# Altium PCB MAGIsDebugger-bak.PcbDoc
Units mil, origin at the board's own origin, x right, y up, seen from the top; angles counter-clockwise.
Board outline 6000 x 4000 mil, 2 copper layers (Top Layer, Bottom Layer); 28 components, 27 nets, 161 pads, 20 vias.
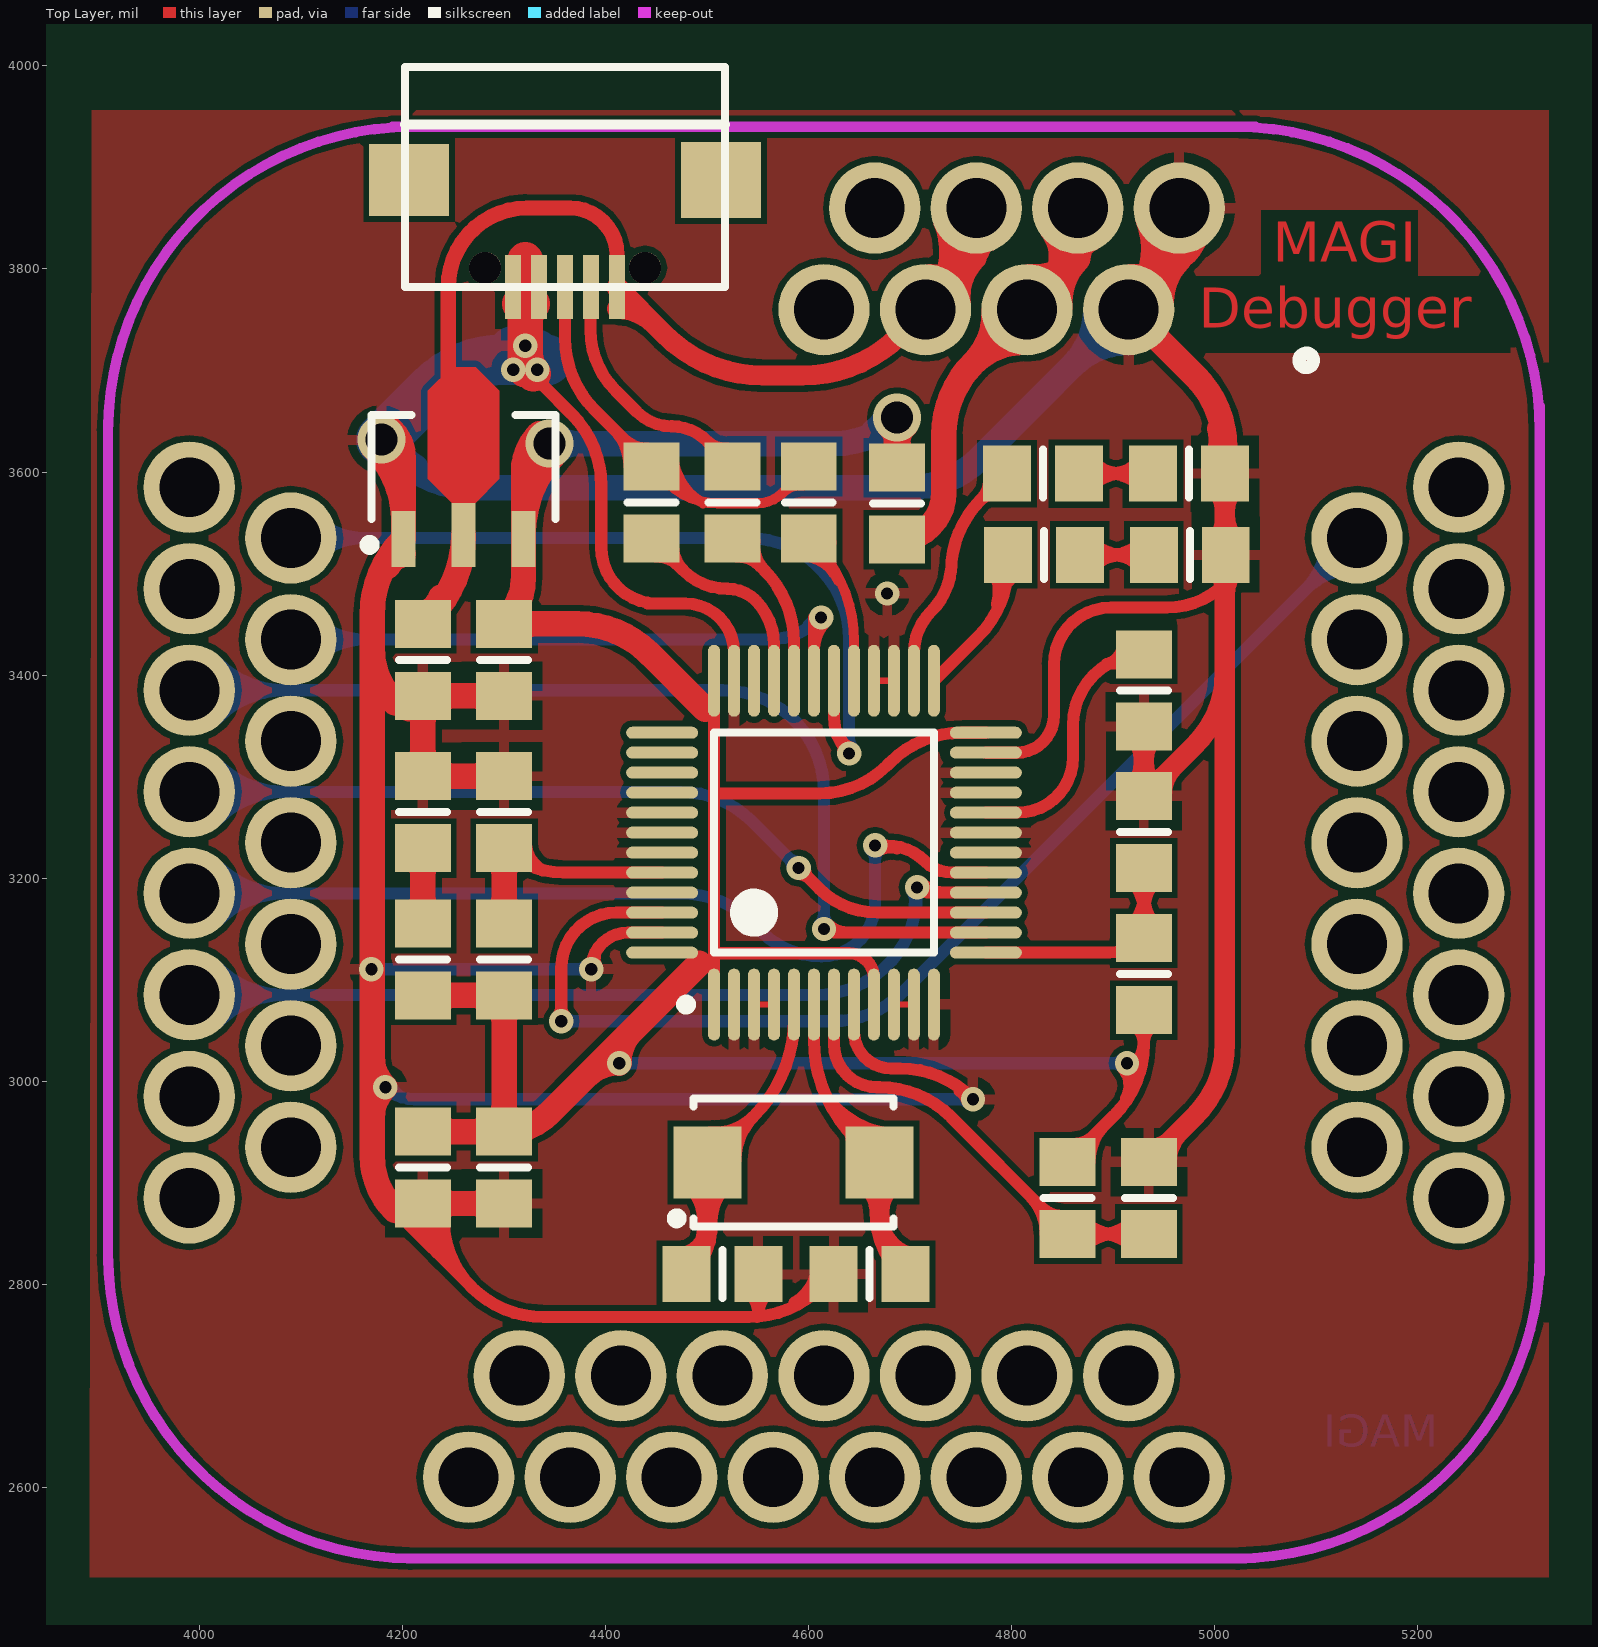
[diagram p0: Top Layer view]
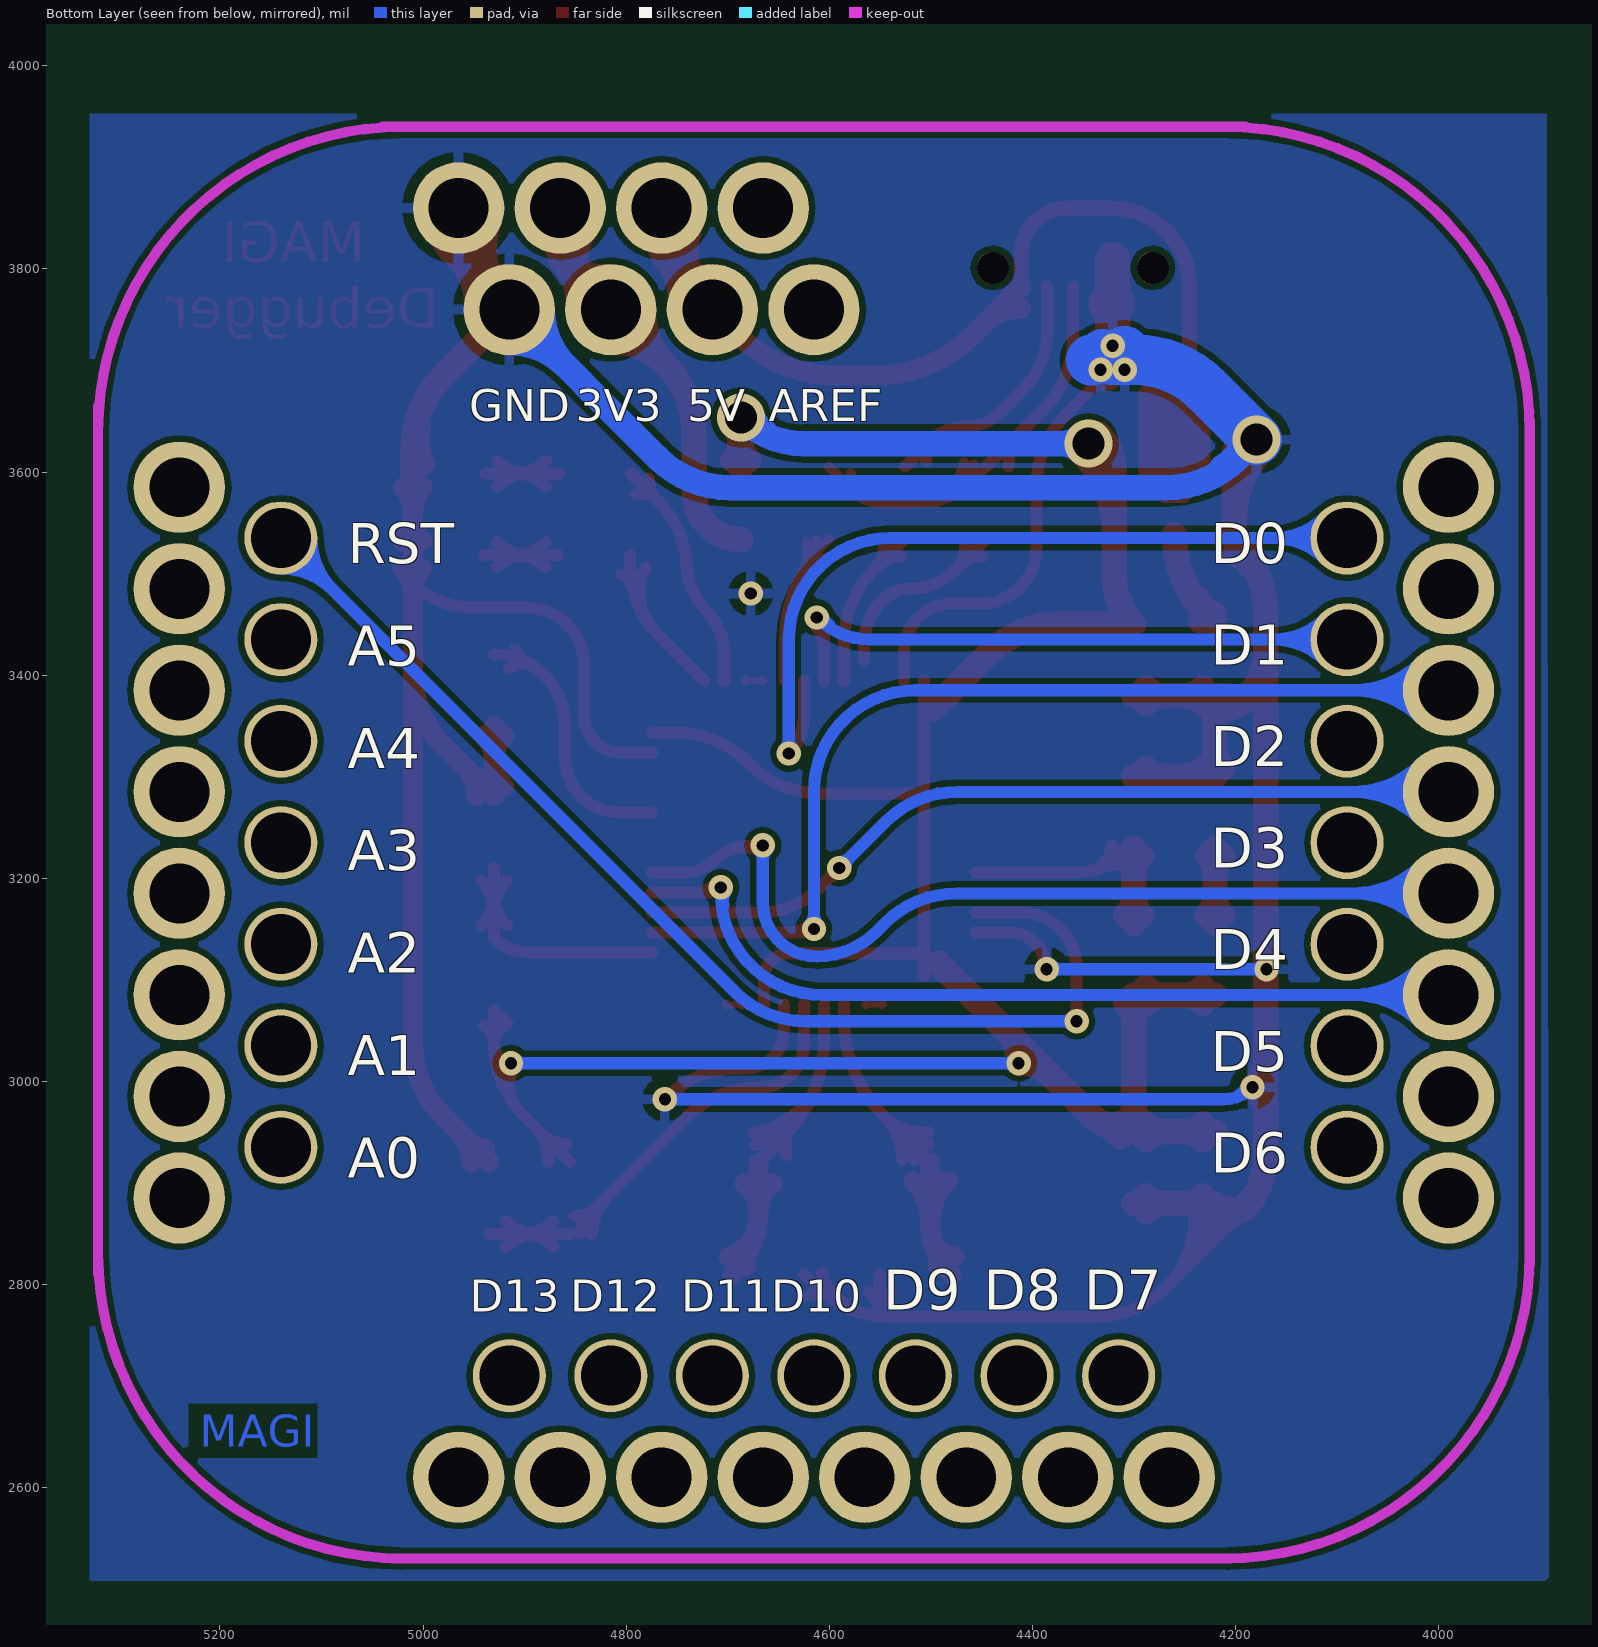
[diagram p1: Bottom Layer view, seen from below]

## Layer stack, top to bottom
Top Solder: solder mask 0.4, Solder Resist, Dk 3.5
Top Layer: signal copper 1.4
Dielectric 1: dielectric 12.6, FR-4, Dk 4.8
Bottom Layer: signal copper 1.4
Bottom Solder: solder mask 0.4, Solder Resist, Dk 3.5

## Board outline
1000,1000 7000,1000 7000,5000 1000,5000

## Design rules (kind name [scope] priority, off if disabled: settings)
Clearance [All] p1: gap=6
PolygonConnect [All] p1: connectstyle=Relief reliefconductorwidth=10 reliefentries=4 polygonreliefangle="90 Angle" airgapwidth=10
RoutingVias [All] p1: holewidth=28 width=50 viastyle="Through Hole" minholewidth=12 minwidth=24 maxholewidth=280 maxwidth=500
SolderMaskExpansion [All] p1: expansion=4
Width [All] p1: maxlimit=100 minlimit=6 preferedwidth=10
29 further rules are at their usual default settings.

## Components (designator, comment, footprint, x,y, rotation, side; value= is the part's Value field where it differs from the comment)
C1 "10uf" 6-0805_n 4220,3415 r270 top
C2 "10uf" 6-0805_n 4300,3415 r270 top
C3 "10uf" 6-0805_n 4300,2915 r270 top
C4 "10uf" 6-0805_N 4220,2915 r270 top
C5 "15PF" 6-0805_n 4515,2810 r180 top
C6 "15PF" 6-0805_n 4660,2810 r0 top
C7 "104" 6-0805_n 4935,2885 r270 top
J1 "MAGIsBoard-2x" MAGIsBoard-2x 4615,3235 r0 top
LED1 "LED_3" 6-0805_n 4975.28,3518.42 r0 top
LED2 "LED_3" 6-0805_n 4974.41,3598.43 r0 top
LED3 "LED_3" 6-0805_n 4220,3265 r90 top
R1 "10K" 6-0805_n 4600,3570 r270 top
R2 "10K" 6-0805_n 4525,3570 r270 top
R3 "10K" 6-0805_n 4930,3105.43 r270 top
R4 "10K" 6-0805_n 4445,3570 r270 top
R5 "10K" 6-0805_n 4930,3245.43 r270 top
R6 "10K" 6-0805_n 4855,2885 r90 top
R7 "10K" 6-0805_n 4300,3120 r270 top
R8 "10K" 6-0805_n 4300,3265 r270 top
R9 "10K" 6-0805_n 4930,3385 r90 top
R10 "RES1_1" 6-0805_n 4831.57,3518.42 r180 top
R11 "RES1_1" 6-0805_n 4830.71,3598.43 r180 top
R12 "RES1_1" 6-0805_n 4220,3120 r270 top
R13 "0" 6-0805_n 4687.01,3568.9 r270 top
U1 "USB" microUSB 4360,3805 r0 top
U2 "STM32F103CBT6" LQFP48_N 4615,3235 r90 top
U3 "HS7333" HS7333 4260,3605 r90 top
X1 "8M" 5032 4595,2920 r270 top

## Footprints (in the part's own frame and the unit in brackets; to place one, negate y for a bottom-side part, rotate by r counter-clockwise, add the part's x,y. Pads: shape width x height; smd on the part's side, far side on the other; paste and mask are expansions set on the pad)
6-0805_n [mm] "Chip Resistor, Body 2.0x1.2mm, IPC Medium Density"
  rect 1.2x1.4 smd: 1(-0.9,0) 2(0.9,0)
  silkscreen extent 0,-0.6 0,0.6, body extent -1.07,-0.7 1.07,0.7, height 0.7
6-0805_N [mm] "Chip Resistor, Body 2.0x1.2mm, IPC Medium Density"
  rect 1.2x1.4 smd: 1(-0.9,0) 2(0.9,0)
  silkscreen extent 0,-0.6 0,0.6, body extent -1.07,-0.7 1.07,0.7, height 0.7
5032 [mm]
  rect 1.8x1.7 smd: 1(0,-2.404) 2(0,1.896)
  silkscreen extent -1.6,-3.3 1.6,2.25
HS7333 [mm] "SOT89, 3-Leads, Body 4.50x2.50mm, Pitch 1.50mm, Lead Span 4.1mm, IPC Medium Density"
  rect 1.4x0.6 smd: 1(-1.8,1.5) 3(-1.8,-1.5)
  rect 1.6x0.6 smd: 2(-1.7,0)
  Top Layer region: -0.9,0.3 -0.3,0.9 1.9,0.9 2.5,0.3 2.5,-0.3 1.9,-0.9 -0.3,-0.9 -0.9,-0.3
  silkscreen extent -2.07,-2.3 1.3,2.47, body extent -1.3,-2.3 1.3,2.3, height 1.6
LQFP48_N [mm] "Thin QFP, 48-Leads, Body 7x7mm, Pitch 0.5mm, IPC Medium Density"
  oval 1.8x0.3 smd: 1(-4.05,2.75) 2(-4.05,2.25) 3(-4.05,1.75) 4(-4.05,1.25) 5(-4.05,0.75) 6(-4.05,0.25) 7(-4.05,-0.25) 8(-4.05,-0.75) 9(-4.05,-1.25) 10(-4.05,-1.75) 11(-4.05,-2.25) 12(-4.05,-2.75) 25(4.05,-2.75) 26(4.05,-2.25) 27(4.05,-1.75) 28(4.05,-1.25) 29(4.05,-0.75) 30(4.05,-0.25) 31(4.05,0.25) 32(4.05,0.75) 33(4.05,1.25) 34(4.05,1.75) 35(4.05,2.25) 36(4.05,2.75)
  oval 0.3x1.8 smd: 13(-2.75,-4.05) 14(-2.25,-4.05) 15(-1.75,-4.05) 16(-1.25,-4.05) 17(-0.75,-4.05) 18(-0.25,-4.05) 19(0.25,-4.05) 20(0.75,-4.05) 21(1.25,-4.05) 22(1.75,-4.05) 23(2.25,-4.05) 24(2.75,-4.05) 37(2.75,4.05) 38(2.25,4.05) 39(1.75,4.05) 40(1.25,4.05) 41(0.75,4.05) 42(0.25,4.05) 43(-0.25,4.05) 44(-0.75,4.05) 45(-1.25,4.05) 46(-1.75,4.05) 47(-2.25,4.05) 48(-2.75,4.05)
  silkscreen extent -4.17,-2.75 2.75,3.57, body extent -3.5,-3.5 3.5,3.5, height 1.6
MAGIsBoard-2x [mil]
  round 90 hole 59.06: 1(300,525) 1(350,625) 2(200,525) 2(250,625) 3(100,525) 3(150,625) 4(0,525) 4(50,625) 29(-625,350) 30(-625,250) 31(-625,150) 32(-625,50) 33(-625,-50) 34(-625,-150) 35(-625,-250) 36(-625,-350) 37(-350,-625) 38(-250,-625) 39(-150,-625) 40(-50,-625) 41(50,-625) 42(150,-625) 43(250,-625) 44(350,-625) 45(625,-350) 46(625,-250) 47(625,-150) 48(625,-50) 49(625,50) 50(625,150) 51(625,250) 52(625,350)
  round 90 / inner round 90 / far side round 72 hole 59.06: 8(-525,300) 9(-525,200) 10(-525,100) 11(-525,0) 12(-525,-100) 13(-525,-200) 14(-525,-300) 15(-300,-525) 16(-200,-525) 17(-100,-525) 18(0,-525) 19(100,-525) 20(200,-525) 21(300,-525) 22(525,-300) 23(525,-200) 24(525,-100) 25(525,0) 26(525,100) 27(525,200) 28(525,300)
  Keep-Out Layer lines w10: -705,-415 -705,415 ; -705,-405 ccw(c-405,-405) -405,-705 ; -705,405 cw(c-405,405) -405,705 ; -425,705 425,705 ; -410,-705 415,-705 ; 405,-705 ccw(c405,-405) 705,-405 ; 405,705 cw(c405,405) 705,405 ; 705,-425 705,430
  silkscreen extent 468,468 482,482
microUSB [mm]
  round 0.8 hole 0.8: 0(-2,-0.1) 0(2,-0.1)
  rect 0.4x1.6 smd: 1(1.3,-0.576) 2(0.65,-0.576) 3(0,-0.576) 4(-0.65,-0.576) 5(-1.3,-0.576)
  rect 2x1.8 smd: 6(-3.9,2.1)
  rect 2x1.9 smd: 7(3.9,2.1)
  silkscreen extent -4,-0.58 4,4.92, body extent -4.1,-0.68 4.1,5.02, height 3

## Part data
C1 C2 C3 C4: library part "CAPACITOR POL", "Capacitor"
C5 C6 C7: library part CAP
R1 R2 R3 R4 R5 R6 R7 R8 R9 R13: library part RES
U2: "STM32 ARM-based 32-bit MCU with 128 Kbytes Flash, 48-pin LQFP, Industrial Temperature"
X1: library part CRYSTAL

## Via types
v1: diameter 24, hole 12, Top Layer to Bottom Layer, 17 vias
v2: diameter 47.24, hole 31.5, Top Layer to Bottom Layer, 3 vias

## Nets (pads, with @x,y where several pads share a name; then routed paths per layer and width w, separated by ;. In a path a pad name is that pad's centre, name@x,y a point inside that pad or via, vN(x,y) a via of type N, cw(c..) or ccw(c..) an arc to the next point about the centre after c; other vN are vias at no path point)
3.3V: C2.1 C3.1 C4.1 R3.2 R6.2 R7.2 R12.2 R13.1 U2.1 U2.9 U2.24 U2.36 U2.48 U3.3 | length 3877.1
  Top Layer w12: U2.1@4506.73,3104.33 4506.73,3126.73 ; U2.36 4506.73,3283.46 ; U2.9 4664.21,3101.54 ccw(c4639.76,3101.54) 4639.76,3125.98 4507.48,3125.98 cw(c4507.48,3126.73) 4506.73,3126.73 ; U2.24 4750.83,3343.27 ccw(c4750.83,3243.27) 4680.12,3313.98 4677.17,3311.02 cw(c4610.63,3377.56) 4610.63,3283.46 4506.73,3283.46 ; R6.2 4900.71,2966.14 ccw(c4830,3036.85) 4930,3036.85 ; R6.2@4858.94,2938.06 ccw(c4858.94,2971.09) 4882.3,2947.73 ; R6.2@4876.56,2920.43 cw(c4928.61,2920.43) 4891.8,2957.24 ; v1@4908.97,3013.65 cw(c4889.54,2995.77) 4912.78,2983.23 ; v1@4915.35,3012.05 ccw(c4908.77,3031) 4928.6,3027.9 ; R3.2@4916.85,3056.85 R3.2 4930,3036.85 ; v1@4916.92,3012.87 ccw(c4898.4,3038.27) 4929.46,3033.41 ; v1@4917.8,3021.78 cw(c4902.64,3007.83) 4920.77,2998.05 ; R3.2@4920.15,3055.39 cw(c4907.64,3036.86) 4930,3036.86 ; R3.2@4939.85,3055.39 ccw(c4952.36,3036.86) 4930,3036.86 ; 4506.73,3126.73 4506.73,3283.46
  Top Layer w25: C4.1 C3.1 ; R12.2 R7.2 C3.1 ; C4.1@4231.8,2942.57 cw(c4250.79,2923.58) 4250.79,2950.43 cw(c4250.79,2977.28) C4.1@4231.8,2958.3 ; R12.2@4231.8,3076.7 cw(c4250.79,3057.72) 4250.79,3084.57 cw(c4250.79,3111.42) R12.2@4231.8,3092.43 ; C3.1@4288.2,2942.57 ccw(c4269.21,2923.58) 4269.21,2950.43 ccw(c4269.21,2977.28) C3.1@4288.2,2958.3 ; R7.2@4288.2,3076.7 ccw(c4269.21,3057.72) 4269.21,3084.57 ccw(c4269.21,3111.42) R7.2@4288.2,3092.43 ; C3.1@4292.14,2958.3 ccw(c4273.15,2977.28) 4300,2977.28 ccw(c4326.85,2977.28) C3.1@4307.86,2958.3 ; R7.2@4292.14,3076.7 cw(c4273.15,3057.72) 4300,3057.72 cw(c4326.85,3057.72) R7.2@4307.86,3076.7 ; C3.1@4309.5,2960.06 ccw(c4321.18,2980.31) C3.1@4327.23,2957.73 ; C2.1@4311.8,3442.57 cw(c4330.79,3423.58) 4330.79,3450.43 cw(c4330.79,3477.28) C2.1@4311.8,3458.3 ; C3.1@4313.57,2944.87 cw(c4339.84,2929.71) 4331.99,2959 ; C2.1@4314.24,3454.61 cw(c4338.87,3464.61) 4315.85,3477.89 ; U3.3@4319.06,3539.7 cw(c4432.74,3539.7) v2@4352.35,3620.09 ; 4319.06,3600.06 cw(c4372.38,3600.06) v2@4334.67,3637.77 ; v2(4344.49,3627.95) ccw(c4344.49,3602.52) 4319.06,3602.52 U3.3 4319.06,3496.44 cw(c4254,3496.44) C2.1 4372.32,3450.43 cw(c4372.32,3350.43) 4443.03,3421.14 4498.03,3366.14 ; 4380.63,3004.65 cw(c4413.39,2971.9) v1@4413.39,3018.22 ; v1@4412.89,3017.72 cw(c4459.2,3017.72) 4426.45,3050.47 ; 4492.13,3116.14 4345.1,2969.11 cw(c4300,3014.21) C3.1 ; R13.1@4679.14,3612.2 ccw(c4660.16,3631.18) 4687.01,3631.18 ccw(c4713.86,3631.18) R13.1@4694.87,3612.2 ; v2@4679.14,3645.68 cw(c4660.16,3626.69) 4687.01,3626.69 cw(c4713.86,3626.69) v2@4694.87,3645.68 ; v2@4680.18,3644.76 cw(c4670.05,3631.72) R13.1@4686.01,3627.44 ; R13.1 v2(4687.01,3653.54) ; R13.1@4688.01,3627.44 cw(c4703.97,3631.72) v2@4693.83,3644.76
  Bottom Layer w12: v1(4413.39,3017.72) v1(4913.39,3017.72) ; v1@4417.63,3013.47 cw(c4427.87,3003.23) 4427.87,3017.72 cw(c4427.87,3032.2) v1@4417.63,3021.96 ; v1@4909.14,3013.47 ccw(c4898.9,3003.23) 4898.9,3017.72 ccw(c4898.9,3032.2) v1@4909.14,3021.96
  Bottom Layer w25: v2(4344.49,3627.95) 4625.23,3627.95 ccw(c4625.23,3715.32) v2(4687.01,3653.54) ; v2@4352.35,3620.09 cw(c4371.34,3601.1) 4371.34,3627.95 cw(c4371.34,3654.8) v2@4352.35,3635.82 ; v2@4676.26,3656.42 cw(c4650.33,3663.37) 4663.75,3640.12 cw(c4677.18,3616.86) v2@4684.13,3642.8
5V: C1.1 J1.3 U1.1 U3.2 | length 1434.4
  Top Layer w15: 4250,3625 cw(c4250,3630) 4245,3630 4245,3782.34 cw(c4322.66,3782.34) 4322.66,3860 4365,3860 cw(c4365,3813.82) 4411.18,3813.82 U1.1
  Top Layer w20: U1.1@4411.18,3760.85 cw(c4411.18,3708.95) 4447.88,3745.65 ; U1.1@4411.18,3780.85 cw(c4411.18,3777.23) U1.1@4413.74,3779.79 ; U1.1 4458.69,3734.83 ccw(c4554.86,3831) 4554.86,3695 4593.67,3695 ccw(c4593.67,3831) J1.3@4689.83,3734.83 ; J1.3@4719.67,3794.69 ccw(c4726.87,3848.12) 4765,3810 ; J1.3@4732.58,3846.82 cw(c4658.35,3816.66) 4715,3760 4765,3810 ; J1.3@4736.32,3781.32 ccw(c4688.67,3828.98) J1.3@4751.1,3854.35 ; J1.3@4749.69,3764.67 cw(c4803.12,3771.87) 4765,3810 ; J1.3@4753.02,3827.11 cw(c4746.79,3810) 4765,3810 ; 4757.64,3802.64 ccw(c4718.98,3841.3) J1.3@4769.63,3861.88 ; J1.3@4765,3860 4765,3810 ; J1.3@4776.98,3827.11 ccw(c4783.21,3810) 4765,3810
  Top Layer w25: C1.1 4226.31,3456.75 ccw(c4144.99,3538.07) U3.2 ; C1.1@4221.06,3461.18 ccw(c4215.08,3483.49) C1.1@4235.09,3471.94 ; C1.1@4234.68,3453.31 cw(c4264.24,3461.23) 4237.74,3476.53
BOOT0: R7.1 R8.2 U2.44 | length 379.1
  Top Layer w12: R8.2 ccw(c4358.17,3287.74) 4358.17,3205.47 U2.44 ; R8.2@4308.5,3212.55 cw(c4317.77,3177.94) 4335.68,3208.97 ; R8.2@4321.38,3232.07 ccw(c4354.68,3236.84) 4337.86,3207.71
  Top Layer w25: R7.1@4292.14,3163.3 ccw(c4273.15,3182.28) 4300,3182.28 ccw(c4326.85,3182.28) R7.1@4307.86,3163.3 ; R8.2@4292.14,3221.7 cw(c4273.15,3202.72) 4300,3202.72 cw(c4326.85,3202.72) R8.2@4307.86,3221.7 ; R7.1 R8.2
BOOT1: R9.2 U2.20 | length 304.3
  Top Layer w12: U2.20 4805.87,3264.53 ccw(c4805.87,3318.9) 4860.24,3318.9 4860.24,3350.67 cw(c4930,3350.67) R9.2 ; R9.2@4909.27,3425.77 cw(c4887.5,3432.69) 4893.41,3410.63 cw(c4900.05,3385.86) R9.2@4915.47,3406.35
GND: C1.2 C2.2 C3.2 C4.2 C5.1 C6.1 C7.1 J1.1 LED1.2 LED2.2 LED3.2 R5.1 R8.1 R9.1 U1.4 U1.5 U2.2 U2.3 U2.4 U2.8 U2.10 U2.11 U2.12 U2.18 U2.19 U2.21 U2.22 U2.23 U2.27 U2.28 U2.35 U2.41 U2.42 U2.43 U2.45 U2.47 U3.1 | length 8287.9
  Top Layer w6: U2.3 U2.4 ; U2.3@4548.16,3073.5 cw(c4553.12,3068.54) 4553.12,3075.55 cw(c4553.12,3082.57) U2.3@4548.16,3077.61 ; U2.4@4563.73,3073.5 ccw(c4558.77,3068.54) 4558.77,3075.55 ccw(c4558.77,3082.57) U2.4@4563.73,3077.61 ; U2.28 U2.27 ; U2.28@4666.27,3392.39 cw(c4671.23,3387.43) 4671.23,3394.45 cw(c4671.23,3401.46) U2.28@4666.27,3396.5 ; U2.27@4681.84,3392.39 ccw(c4676.88,3387.43) 4676.88,3394.45 ccw(c4676.88,3401.46) U2.27@4681.84,3396.5 ; U2.10 U2.11 ; U2.10@4685.95,3073.5 cw(c4690.91,3068.54) 4690.91,3075.55 cw(c4690.91,3082.57) U2.10@4685.95,3077.61 ; U2.11@4701.53,3073.5 ccw(c4696.57,3068.54) 4696.57,3075.55 ccw(c4696.57,3082.57) U2.11@4701.53,3077.61
  Top Layer w12: 4192.44,2872.68 4268.11,2797.01 ; C4.2@4193.86,2883.84 ccw(c4215.92,2880.71) C4.2@4200.16,2864.95 ; C4.2@4205.74,2882.15 ccw(c4245.66,2876.48) 4217.15,2847.97 ; C4.2@4217.62,2880.46 ccw(c4275.41,2872.25) 4234.14,2830.98 ; C4.2@4229.5,2878.78 ccw(c4305.15,2868.03) 4251.12,2813.99 ; C4.2@4241.38,2877.09 ccw(c4334.9,2863.8) 4268.11,2797.01 ; v1(4332.68,3700.79) ccw(c4356.44,3700.79) 4339.63,3683.99 4366.38,3657.24 cw(c4295.67,3586.53) 4395.67,3586.53 4395.67,3525.59 ccw(c4450.79,3525.59) 4441.1,3471.33 ccw(c4441.96,3471.33) 4441.96,3470.47 4478.35,3470.47 cw(c4478.35,3422.4) 4526.42,3422.4 U2.35 ; 4335.86,3688.91 cw(c4345.14,3691.39) v1@4337.47,3697.18 ; v1@4382.83,3115.43 ccw(c4375.58,3127.98) 4389.58,3124.23 ccw(c4403.57,3120.48) v1@4391.02,3113.24 ; v1(4385.83,3110.24) cw(c4422.01,3110.24) 4422.01,3146.42 U2.47 ; C5.1@4540.07,2791.81 cw(c4525.26,2771.45) 4550.43,2771.45 ; 4549.02,2768.05 ccw(c4545.62,2771.45) 4550.43,2771.45 ; C5.1 4550.43,2771.45 ; C5.1@4560.8,2791.81 ccw(c4575.61,2771.45) 4550.43,2771.45 ; 4586.01,2781.95 ccw(c4562.32,2822.16) C6.1@4607.51,2810.48 ; 4591.04,2784.91 cw(c4610.54,2751.81) C6.1@4620.15,2789 ; C6.1 4611.57,2797.01 cw(c4540.86,2867.72) 4540.86,2767.72 4338.82,2767.72 cw(c4338.82,2867.72) 4268.11,2797.01 ; U2.8 4644.53,3049.24 ccw(c4681.1,3049.24) 4681.1,3012.67 4690.01,3012.67 cw(c4690.01,2912.67) 4760.72,2983.38 v1(4761.81,2982.28) ; 4748.7,2990.42 cw(c4740.7,2976.78) v1@4756,2980.77 ; 4750.33,2989.47 ccw(c4756.98,3000.82) v1@4760.3,2988.09 ; U2.23 4804.83,3323.58 ccw(c4804.83,3360.24) 4841.48,3360.24 4841.48,3410.38 cw(c4897.64,3410.38) 4897.64,3466.54 4952.81,3466.54 ccw(c4952.81,3547.19) 5009.84,3490.16 ; LED1.2@5009.84,3509.17 ccw(c4960.79,3518.43) LED1.2
  Top Layer w20: R5.1@4920.37,3290.5 ccw(c4897.11,3313.75) 4930,3313.75 ccw(c4962.89,3313.75) R5.1@4939.63,3290.5 ; R9.1@4920.37,3339.93 cw(c4897.11,3316.68) 4930,3316.68 cw(c4962.89,3316.68) R9.1@4939.63,3339.93 ; R9.1 R5.1 4980.55,3331.42 ccw(c4909.84,3402.13) 5009.84,3402.13 ; R5.1@4933.94,3294.49 ccw(c4933.94,3317.87) R5.1@4950.47,3301.34 ; C7.1 4980.55,2965.99 ccw(c4909.84,3036.7) 5009.84,3036.7 5009.84,3402.13 ; C7.1@4938.94,2934.06 ccw(c4938.94,2957.44) C7.1@4955.47,2940.9 ; R5.1@4947.56,3280.87 cw(c4989.95,3280.87) 4959.98,3310.84 ; C7.1@4952.56,2920.43 cw(c4994.95,2920.43) 4964.98,2950.41 ; LED2.2@5000.21,3584.86 cw(c4976.96,3561.6) 5009.84,3561.6 cw(c5042.73,3561.6) LED2.2@5019.47,3584.86 ; LED1.2@5001.08,3504.86 cw(c4979.91,3483.69) 5009.84,3483.69 ; LED1.2@5001.08,3531.99 ccw(c4979.91,3553.16) 5009.84,3553.16 ; 5009.84,3479.51 cw(c5045.69,3479.51) LED1.2@5020.34,3504.86 ; 5009.84,3557.34 ccw(c5045.69,3557.34) LED1.2@5020.34,3531.99 ; LED2.2 5009.84,3509.17 5009.84,3490.16 ; 5009.84,3402.13 5009.84,3490.16 ; 5009.84,3490.14 cw(c5023.92,3490.14) 5017.21,3502.52 ccw(c5023.92,3490.14) 5009.84,3490.14 ; 5009.84,3490.14 ccw(c4993.86,3490.14) 5002.96,3503.29 cw(c4993.86,3490.14) 5009.84,3490.14
  Top Layer w25: 4170,2963.75 cw(c4213.42,2963.75) v1@4182.72,2994.45 ; 4170,3024.44 ccw(c4213.42,3024.44) v1@4182.72,2993.74 ; v2@4171.27,3624.03 cw(c4099.63,3552.38) U3.1@4200.94,3552.38 ; v2(4179.13,3631.89) cw(c4179.13,3610.08) 4200.94,3610.08 U3.1 ccw(c4275.65,3459.43) 4170,3459.43 4170,3426.85 ; 4185.45,3507.3 cw(c4207.29,3494.69) U3.1@4200.77,3519.05 ; 4186.88,2882.31 ccw(c4215.68,2898.94) C4.2@4216.34,2865.69 ; 4186.88,3382.31 ccw(c4215.68,3398.94) C1.2@4216.34,3365.69 ; v2@4188.95,3641.7 cw(c4159.98,3612.74) 4200.94,3612.74 ; 4192.44,2872.68 cw(c4246.62,2926.85) 4170,2926.85 4170,3426.85 ; LED3.2@4212.14,3308.3 ccw(c4193.15,3327.28) 4220,3327.28 ccw(c4246.85,3327.28) LED3.2@4227.86,3308.3 ; C1.2@4212.14,3371.7 cw(c4193.15,3352.72) 4220,3352.72 cw(c4246.85,3352.72) C1.2@4227.86,3371.7 ; C4.2 C3.2 ; C4.2@4231.8,2871.7 cw(c4250.79,2852.72) 4250.79,2879.57 cw(c4250.79,2906.42) C4.2@4231.8,2887.43 ; LED3.2@4231.8,3292.57 cw(c4250.79,3273.58) 4250.79,3300.43 cw(c4250.79,3327.28) LED3.2@4231.8,3308.3 ; C1.2@4231.8,3371.7 cw(c4250.79,3352.72) 4250.79,3379.57 cw(c4250.79,3406.42) C1.2@4231.8,3387.43 ; C3.2@4288.2,2871.7 ccw(c4269.21,2852.72) 4269.21,2879.57 ccw(c4269.21,2906.42) C3.2@4288.2,2887.43 ; R8.1@4288.2,3292.57 ccw(c4269.21,3273.58) 4269.21,3300.43 ccw(c4269.21,3327.28) R8.1@4288.2,3308.3 ; C2.2@4288.2,3371.7 ccw(c4269.21,3352.72) 4269.21,3379.57 ccw(c4269.21,3406.42) C2.2@4288.2,3387.43 ; R8.1 LED3.2 C1.2 ; C2.2 C1.2 ; J1.1@4917.48,3792.41 ccw(c4922.1,3852.89) 4965,3810 ; J1.1@4934.5,3848.77 cw(c4855.38,3819.62) J1.1@4915,3760 ; J1.1@4942.63,3787.63 ccw(c4895.77,3834.5) J1.1@4957.96,3857.41 ; J1.1@4947.41,3762.48 cw(c5007.89,3767.1) 4965,3810 ; J1.1@4951.81,3830.3 cw(c4942.79,3810) 4965,3810 ; J1.1@4965,3860 4965,3810 ; 4970.27,3815.27 ccw(c4936.16,3849.38) J1.1@4981.42,3866.05 ; J1.1@4978.19,3830.3 ccw(c4987.21,3810) 4965,3810 ; LED2.2@5000.21,3607.92 ccw(c4960.6,3630.79) 5004.78,3642.63 ; LED2.2 5009.84,3623.74 ccw(c4909.84,3623.74) 4980.55,3694.45 J1.1@4915,3760 ; 4170,3426.85 ccw(c4246.62,3426.85) 4192.44,3372.68 cw(c4209.07,3356.04) 4209.07,3379.57 C1.2 ; J1.1@4915,3760 4965,3810
  Top Layer w35: U1.5@4315.63,3765.53 cw(c4302.97,3752.88) 4320.87,3752.88 ; v1@4320.87,3700.79 v1(4320.87,3724.41) 4320.87,3809.06 ; 4320.87,3749.26 cw(c4343.87,3749.26) U1.4@4327.6,3765.53 ; v1@4320.87,3716.02 ccw(c4347.91,3716.02) v1@4328.79,3696.9 ; v1@4320.87,3716.02 ccw(c4347.91,3716.02) v1@4328.79,3696.9 ; v1@4320.87,3716.02 ccw(c4347.91,3716.02) v1@4328.79,3696.9
  Bottom Layer w12: v1(4169.29,3110.24) v1(4385.83,3110.24) ; v1@4173.53,3105.99 cw(c4183.78,3095.75) 4183.78,3110.24 cw(c4183.78,3124.72) v1@4173.53,3114.48 ; v1(4183.07,2994.09) ccw(c4211.59,3022.61) 4211.59,2982.28 v1(4761.81,2982.28) ; v1@4184.62,2988.3 cw(c4188.37,2974.31) 4195.62,2986.85 cw(c4202.86,2999.4) v1@4188.87,2995.65 ; v1@4381.58,3105.99 ccw(c4371.34,3095.75) 4371.34,3110.24 ccw(c4371.34,3124.72) v1@4381.58,3114.48 ; v1@4757.57,2978.04 ccw(c4747.33,2967.8) 4747.33,2982.28 ccw(c4747.33,2996.77) v1@4757.57,2986.53
  Bottom Layer w25: v2(4179.13,3631.89) 4197.09,3613.93 ccw(c4267.8,3684.65) 4267.8,3584.65 4698.22,3584.65 ccw(c4698.22,3684.65) 4768.93,3613.94 J1.1@4915,3760 ; v2@4189.88,3634.77 ccw(c4237.49,3647.53) 4212.84,3604.84 ; J1.1@4882.5,3760 cw(c4804.04,3760) 4859.52,3704.52 cw(c4915,3649.04) J1.1@4915,3727.5
  Bottom Layer w50: v2(4179.13,3631.89) 4228.58,3681.34 cw(c4299.3,3610.63) 4299.3,3710.63 4320.87,3710.63 ; 4308.2,3713.01 cw(c4310.71,3703.65) 4315.56,3712.05 ; 4309.22,3718.63 ccw(c4322.13,3725.03) 4317.53,3711.38 ; 4318.98,3710.63 ccw(c4318.98,3726.29) 4330.06,3715.22 ; 4327.58,3714.33 ccw(c4327.27,3718.82) 4330.66,3715.86 ; 4340.3,3710.63 cw(c4340.3,3708.41) 4341.87,3709.98
  other v1: 4677.17,3480.32 4309.06,3700.79
GRN: R10.2 U2.25 | length 216.7
  Top Layer w12: U2.25 4766.85,3438.03 ccw(c4696.14,3508.74) 4796.14,3508.74 R10.2 ; R10.2@4780.88,3505.68 cw(c4739.64,3481.87) 4785.64,3469.54 ; 4787.5,3476.48 cw(c4823.69,3466.78) R10.2@4804.95,3499.23
NetJ1_2: J1.2 R13.2 | length 788.8
  Top Layer w25: R13.2 ccw(c4687.01,3579.52) 4733.07,3579.52 4733.07,3636.65 cw(c4833.07,3636.65) 4762.36,3707.36 ; J1.2@4782.52,3758.77 cw(c4713.56,3756.16) 4762.36,3707.36 ; J1.2@4813.77,3727.52 ccw(c4811.16,3658.56) 4762.36,3707.36 ; J1.2@4817.48,3792.41 ccw(c4822.1,3852.89) 4865,3810 ; J1.2@4839.37,3840.02 cw(c4803.99,3812.43) J1.2@4835.71,3780.71 ; J1.2@4847.41,3762.48 cw(c4907.89,3767.1) 4865,3810 ; J1.2@4851.81,3830.3 cw(c4842.79,3810) 4865,3810 ; 4855.71,3800.71 ccw(c4826.47,3829.96) J1.2@4859.09,3855.39 ; J1.2@4865,3851.42 4865,3810 ; J1.2@4878.19,3830.3 ccw(c4887.21,3810) 4865,3810 ; 4762.36,3707.36 4815,3760 J1.2@4835.71,3780.71 ; J1.2@4835.71,3780.71 4865,3810
NetLED1_1: LED1.1 R10.1 | length 206.5
  Top Layer w12: R10.1 LED1.1 ; R10.1@4879.47,3505.96 cw(c4909.55,3475.88) 4909.55,3518.42 cw(c4909.55,3560.97) R10.1@4879.47,3530.89 ; LED1.1@4927.38,3505.96 ccw(c4897.3,3475.88) 4897.3,3518.42 ccw(c4897.3,3560.97) LED1.1@4927.38,3530.89
NetLED2_1: LED2.1 R11.1 | length 206.5
  Top Layer w12: R11.1 LED2.1 ; R11.1@4878.6,3585.96 cw(c4908.69,3555.88) 4908.69,3598.42 cw(c4908.69,3640.97) R11.1@4878.6,3610.89 ; LED2.1@4926.52,3585.96 ccw(c4896.43,3555.88) 4896.43,3598.43 ccw(c4896.43,3640.97) LED2.1@4926.52,3610.89
NetLED3_1: LED3.1 R12.1 | length 158.5
  Top Layer w25: R12.1@4212.14,3163.3 ccw(c4193.15,3182.28) 4220,3182.28 ccw(c4246.85,3182.28) R12.1@4227.86,3163.3 ; LED3.1@4212.14,3221.7 cw(c4193.15,3202.72) 4220,3202.72 cw(c4246.85,3202.72) LED3.1@4227.86,3221.7 ; R12.1 LED3.1
NetR1_2: R1.2 U2.29 | length 244.9
  Top Layer w10: R1.2 4604.69,3529.87 cw(c4508.53,3433.71) 4644.53,3433.71 U2.29 ; R1.2@4600.2,3516.32 cw(c4592.5,3478.81) 4624.47,3499.9 ; R1.2@4612.38,3532.83 ccw(c4639.31,3527.31) R1.2@4616.37,3512.18 ; R1.2@4622.18,3530.83 ccw(c4672.75,3520.46) 4629.66,3492.03
NetR2_2: R2.2 U2.32 | length 218.4
  Top Layer w12: R2.2 4556.18,3503.38 ; R2.2@4528.94,3516.94 cw(c4528.94,3483.91) 4552.3,3507.27 ; R2.2@4546.41,3532.24 ccw(c4580.51,3527.71) 4556.18,3503.39 ; U2.32 4585.47,3432.67 ccw(c4485.47,3432.67) 4556.18,3503.38
NetR4_2: R4.2 U2.33 | length 245.4
  Top Layer w12: R4.2 4476.58,3502.98 ; R4.2@4448.94,3516.94 cw(c4448.94,3483.91) 4472.3,3507.27 ; R4.2@4466.43,3532.43 ccw(c4501.72,3528.13) 4476.58,3502.99 ; U2.33@4565.79,3414.81 4565.79,3429.86 ccw(c4504.03,3429.86) 4547.7,3473.53 ccw(c4520,3445.83) 4520,3485 cw(c4520,3546.4) 4476.58,3502.98
NRST: C7.2 R6.1 U2.7 | length 623.1
  Top Layer w12: U2.7 4624.84,3036.57 ccw(c4667.32,3036.57) 4667.32,2994.09 4669.48,2994.09 cw(c4669.48,2894.09) 4740.19,2964.81 4836.92,2868.08 cw(c4819.4,2850.56) R6.1@4844.18,2850.56 ; 4817.89,2887.11 cw(c4780.35,2849.57) R6.1@4833.44,2849.57 ; 4828.44,2876.56 ccw(c4851.06,2899.18) R6.1@4851.06,2867.19 ; R6.1 C7.2 ; R6.1@4871.4,2837.11 cw(c4901.48,2807.02) 4901.48,2849.57 cw(c4901.48,2892.11) R6.1@4871.4,2862.03 ; C7.2@4918.6,2837.11 ccw(c4888.52,2807.02) 4888.52,2849.57 ccw(c4888.52,2892.11) C7.2@4918.6,2862.03
OSC_IN: C5.2 U2.5 X1.1 | length 586.5
  Top Layer w12: X1.1 4545.64,2965.28 ; X1.1@4501.56,2937.39 ccw(c4504.1,2969.98) X1.1@4527.22,2946.86 ; X1.1@4502.49,2949.35 ccw(c4506.77,3004.15) 4545.64,2965.28 ; X1.1@4515.82,2922.02 cw(c4548.01,2922.13) X1.1@4525.25,2944.89 ; X1.1@4527.82,2922.06 cw(c4588.66,2922.26) 4545.64,2965.28 ; U2.5 4585.47,3061.45 cw(c4449.47,3061.45) 4545.64,2965.28
  Top Layer w20: C5.2@4476.89,2827.29 ccw(c4470.56,2858.93) 4498.5,2842.8 ; C5.2 ccw(c4429.38,2860.18) 4500.35,2860.18 X1.1 ; X1.1@4483.76,2901.44 cw(c4443.71,2861.38) 4500.35,2861.38 cw(c4557,2861.38) X1.1@4516.95,2901.44 ; C5.2@4492.72,2817.46 cw(c4518,2824.23) C5.2@4495.34,2837.32
OSC_OUT: C6.2 U2.6 X1.2 | length 560.7
  Top Layer w12: U2.6 4605.16,3040.82 ccw(c4741.16,3040.82) 4644.99,2944.65 X1.2 ; 4615.73,2987.07 ccw(c4691.14,3039.09) X1.2@4674.6,2948.98 ; 4632.18,2963.22 ccw(c4683.75,2998.79) X1.2@4672.44,2937.18 ; 4636.06,2957.61 cw(c4602.31,2934.33) X1.2@4642.63,2926.93
  Top Layer w20: X1.2@4655.95,2898.98 cw(c4636.73,2872.26) 4669.65,2872.26 ; X1.2 4669.65,2872.26 ; 4674.91,2845.55 ccw(c4709.21,2865.35) C6.2@4698.96,2827.09 ; C6.2@4679.66,2837.32 cw(c4657,2824.23) C6.2@4682.28,2817.46 ; X1.2@4683.34,2898.98 ccw(c4702.56,2872.26) 4669.65,2872.26 ; C6.2 cw(c4757.69,2872.26) 4669.65,2872.26
PA3-VREF: R3.1 R5.2 U2.13 | length 362.1
  Top Layer w12: U2.13 4895.88,3126.73 ccw(c4895.88,3174.99) R3.1 R5.2 ; R3.1@4917.54,3153.33 ccw(c4887.46,3183.41) 4930,3183.41 ccw(c4972.54,3183.41) R3.1@4942.46,3153.33 ; R5.2@4917.54,3197.54 cw(c4887.46,3167.46) 4930,3167.46 cw(c4972.54,3167.46) R5.2@4942.46,3197.54
RED: R11.2 U2.26 | length 279.3
  Top Layer w12: U2.26 4703.58,3421.82 cw(c4761.25,3421.82) 4720.47,3462.6 ccw(c4671.77,3511.3) 4740.17,3503.18 ; 4740.16,3501.89 cw(c4840.16,3501.89) 4740.17,3503.18 ; R11.2@4777.67,3593.73 cw(c4749.53,3592.51) 4769.45,3572.6 ; R11.2@4790.03,3577.67 ccw(c4783.93,3558.12) 4769.45,3572.6 ; R11.2 4769.45,3572.6 ; 4740.17,3503.18 ccw(c4671.77,3511.3) 4740.65,3511.3 4740.65,3511.76 cw(c4840.16,3501.89) 4769.45,3572.6
RXD: J1.8 U2.30 | length 1022.1
  Top Layer w12: U2.30 4624.84,3358.86 ccw(c4675.79,3358.86) v1(4639.76,3322.83) ; v1@4633.97,3324.39 ccw(c4619.98,3328.14) 4632.52,3335.38 ccw(c4645.07,3342.62) v1@4641.32,3328.63
  Bottom Layer w12: J1.8 4539.76,3535 cw(c4539.76,3435) 4639.76,3435 v1(4639.76,3322.83) ; J1.8@4102.73,3522.27 cw(c4133.46,3491.54) 4133.46,3535 cw(c4133.46,3578.46) J1.8@4102.73,3547.73 ; J1.8@4111.21,3513.79 cw(c4162.43,3462.57) 4162.43,3535 cw(c4162.43,3607.43) J1.8@4111.21,3556.21 ; v1@4635.52,3327.08 ccw(c4625.28,3337.32) 4639.76,3337.32 ccw(c4654.25,3337.32) v1@4644.01,3327.08
TCK: J1.32 U2.15 | length 1121.7
  Top Layer w12: v1@4590,3204 cw(c4590,3189.51) 4600.24,3199.76 cw(c4610.49,3210) v1@4596,3210 ; v1(4590,3210) 4610,3190 ccw(c4667.69,3247.69) 4667.69,3166.1 U2.15
  Bottom Layer w12: J1.32 4473.58,3285 cw(c4473.58,3185) 4544.29,3255.71 v1(4590,3210) ; J1.32@4009.09,3265.91 cw(c4055.18,3219.82) 4055.18,3285 cw(c4055.18,3350.18) J1.32@4009.09,3304.09 ; J1.32@4017.58,3257.42 cw(c4084.15,3190.85) 4084.15,3285 cw(c4084.15,3379.15) J1.32@4017.58,3312.58 ; v1@4584,3210 ccw(c4569.51,3210) 4579.76,3220.24 ccw(c4590,3230.49) v1@4590,3216
TDI: J1.33 U2.17 | length 1188.2
  Top Layer w12: v1(4665.35,3232.28) 4676.55,3232.28 cw(c4676.55,3178.52) 4714.57,3216.54 ccw(c4741.28,3243.24) 4741.28,3205.47 U2.17 ; v1@4668.35,3227.09 cw(c4680.54,3205.98) 4686.85,3229.52
  Bottom Layer w12: J1.33 4474.37,3185 cw(c4474.37,3085) 4545.08,3155.71 4553.22,3147.57 ccw(c4612.57,3206.93) 4612.57,3122.98 ccw(c4612.57,3175.76) 4665.35,3175.76 v1(4665.35,3232.28) ; J1.33@4009.09,3165.91 cw(c4055.18,3119.82) 4055.18,3185 cw(c4055.18,3250.18) J1.33@4009.09,3204.09 ; J1.33@4017.58,3157.42 cw(c4084.15,3090.85) 4084.15,3185 cw(c4084.15,3279.15) J1.33@4017.58,3212.58 ; v1@4661.11,3228.04 cw(c4650.87,3217.8) 4665.35,3217.8 cw(c4679.84,3217.8) v1@4669.6,3228.04
TDO: J1.34 U2.16 | length 1148.6
  Top Layer w12: v1(4706.69,3190.94) ccw(c4719.14,3203.4) 4719.14,3185.79 ; v1@4710.94,3195.19 ccw(c4733.63,3217.88) 4733.63,3185.79 ; v1@4712.66,3191.6 ccw(c4719.14,3192.31) 4719.14,3185.79 ; U2.16 4719.14,3185.79
  Bottom Layer w12: J1.34 4606.69,3085 ccw(c4606.69,3185) 4706.69,3185 v1(4706.69,3190.94) ; J1.34@4009.09,3065.91 cw(c4055.18,3019.82) 4055.18,3085 cw(c4055.18,3150.18) J1.34@4009.09,3104.09 ; J1.34@4017.58,3057.42 cw(c4084.15,2990.85) 4084.15,3085 cw(c4084.15,3179.15) J1.34@4017.58,3112.58 ; v1@4701.65,3187.69 cw(c4685.9,3177.51) 4704.23,3173.57
TMS: J1.31 U2.14 | length 1265.6
  Top Layer w12: v1@4619.24,3154.24 ccw(c4638.13,3173.13) 4638.13,3146.42 ; v1@4625,3146.42 U2.14
  Bottom Layer w12: J1.31 4515,3385 cw(c4515,3285) 4615,3285 v1(4615,3150) v1@4611.42,3146.42 ; J1.31@4009.09,3365.91 cw(c4055.18,3319.82) 4055.18,3385 cw(c4055.18,3450.18) J1.31@4009.09,3404.09 ; J1.31@4017.58,3357.42 cw(c4084.15,3290.85) 4084.15,3385 cw(c4084.15,3479.15) J1.31@4017.58,3412.58 ; v1@4610.76,3154.24 ccw(c4600.51,3164.49) 4615,3164.49 ccw(c4629.49,3164.49) v1@4619.24,3154.24
TRST: J1.28 U2.46 | length 1387
  Top Layer w12: v1@4352.06,3063.3 ccw(c4341.81,3073.54) 4356.3,3073.54 ccw(c4370.78,3073.54) v1@4360.54,3063.3 ; v1(4356.3,3059.06) 4356.3,3111.62 cw(c4410.78,3111.62) 4410.78,3166.1 U2.46
  Bottom Layer w12: v1(4356.3,3059.06) 4622.63,3059.06 ccw(c4622.63,3159.06) 4693.34,3088.34 J1.28 ; v1@4360.54,3054.81 cw(c4370.78,3044.57) 4370.78,3059.06 cw(c4370.78,3073.54) v1@4360.54,3063.3 ; J1.28@5110,3535 cw(c5037.57,3535) 5088.79,3483.79 cw(c5140,3432.57) J1.28@5140,3505 ; J1.28@5122,3535 cw(c5078.54,3535) 5109.27,3504.27 cw(c5140,3473.54) J1.28@5140,3517
TXD: J1.9 U2.31 | length 825.3
  Top Layer w12: U2.31 v1@4605.16,3456.69 ; U2.31@4605.16,3425.19 cw(c4643.7,3425.19) v1@4616.45,3452.45
  Bottom Layer w12: J1.9 4559.83,3435 ccw(c4559.83,3509.06) v1(4612.2,3456.69) ; J1.9@4102.73,3422.27 cw(c4133.46,3391.54) 4133.46,3435 cw(c4133.46,3478.46) J1.9@4102.73,3447.73 ; J1.9@4111.21,3413.79 cw(c4162.43,3362.57) 4162.43,3435 cw(c4162.43,3507.43) J1.9@4111.21,3456.21 ; v1@4606.41,3458.25 cw(c4592.42,3461.99) 4599.66,3449.45 cw(c4606.9,3436.91) v1@4610.65,3450.9
USBDM: R2.1 U1.2 | length 294
  Top Layer w12: U1.2 ccw(c4387.02,3780.92) 4385,3780.92 4385,3740 ccw(c4469.5,3740) 4409.75,3680.25 4430.86,3659.14 ccw(c4465,3693.28) 4465,3645 cw(c4465,3595.67) 4499.88,3630.55 ; R2.1@4504.39,3611.13 ccw(c4486.56,3617.23) 4499.88,3630.55 ; R2.1@4519.91,3623.02 cw(c4518.21,3648.87) 4499.88,3630.55 ; R2.1 4499.88,3630.55
USBDP: R1.1 R4.1 U1.3 | length 595.5
  Top Layer w10: R4.1 4460.91,3589.52 ccw(c4510,3638.61) 4510,3569.19 4548.9,3569.19 ccw(c4548.9,3606.1) 4575,3580 ; R4.1@4453.76,3587.45 cw(c4458.51,3569.72) R4.1@4467.68,3585.61 ; R4.1@4457.38,3607.16 ccw(c4496.76,3615.24) 4476.66,3580.43 ; R4.1@4467.18,3609.17 ccw(c4525.89,3621.21) 4495.93,3569.31 ; R1.1@4578.78,3598.49 cw(c4562.89,3592.11) 4575,3580 ; R1.1@4594.25,3586.9 ccw(c4591.93,3563.07) 4575,3580 ; R1.1 4600,3605 4575,3580
  Top Layer w12: U1.3 4360,3731.85 ccw(c4460,3731.85) 4389.29,3661.14 R4.1 ; 4408.2,3642.24 cw(c4371.39,3605.43) R4.1@4423.44,3605.43 ; 4417.7,3632.73 ccw(c4441.06,3656.09) R4.1@4441.06,3623.05
pads on no net: J1.4 J1.10 J1.11 J1.12 J1.13 J1.14 J1.15 J1.16 J1.17 J1.18 J1.19 J1.20 J1.21 J1.22 J1.23 J1.24 J1.25 J1.26 J1.27 J1.29 J1.30 J1.35 J1.36 J1.37 J1.38 J1.39 J1.40 J1.41 J1.42 J1.43 J1.44 J1.45 J1.46 J1.47 J1.48 J1.49 J1.50 J1.51 J1.52 U1.0 U1.6 U1.7 U2.34 U2.37 U2.38 U2.39 U2.40

## Polygon pours and split planes (outlines as drawn)
GND on Bottom Layer "Bottom Layer-No Net" (solid, pour order 2): 3893.13,3952.71 5328.17,3952.71 5328.17,2507.83 3891.17,2507.83
GND on Top Layer "Bottom Layer-No Net" (solid, pour order 4): 3893.91,3956.25 5328.95,3956.25 5328.95,2511.37 3891.95,2511.37 3891.95,2518.06

## Other copper
Top Layer:
  text "MAGI" at 5057.09,3807.09 h39.37
  text "Debugger" at 4984.25,3742.13 h39.37

## Text inside footprints (layer, text, board x,y; h text height)
J1: Bottom Overlay "AREF" at 4659.57,3649.84 h31.5; Bottom Overlay "5V" at 4739.57,3649.84 h31.5; Bottom Overlay "3V3" at 4849.57,3649.84 h31.5; Bottom Overlay "GND" at 4954.57,3649.84 h31.5; Bottom Overlay "RST" at 5073.98,3510.08 h39.37; Bottom Overlay "A5" at 5073.98,3409.25 h39.37; Bottom Overlay "A4" at 5073.98,3308.41 h39.37; Bottom Overlay "A3" at 5073.98,3207.58 h39.37; Bottom Overlay "A2" at 5073.98,3106.75 h39.37; Bottom Overlay "A1" at 5073.98,3005.91 h39.37; Bottom Overlay "A0" at 5073.98,2905.08 h39.37; Bottom Overlay "D13" at 4953.98,2772.95 h31.5; Bottom Overlay "D12" at 4854.98,2772.95 h31.5; Bottom Overlay "D11" at 4745.48,2772.95 h31.5; Bottom Overlay "D10" at 4656.97,2772.95 h31.5; Bottom Overlay "D9" at 4546.98,2775.08 h39.37; Bottom Overlay "D8" at 4447.98,2775.08 h39.37; Bottom Overlay "D7" at 4348.98,2775.08 h39.37; Bottom Overlay "D6" at 4223.98,2910.08 h39.37; Bottom Overlay "D5" at 4223.98,3010.08 h39.37; Bottom Overlay "D4" at 4223.98,3110.08 h39.37; Bottom Overlay "D3" at 4223.98,3210.08 h39.37; Bottom Overlay "D2" at 4223.98,3310.08 h39.37; Bottom Overlay "D1" at 4223.98,3410.08 h39.37; Bottom Overlay "D0" at 4223.98,3510.08 h39.37; Bottom Layer "MAGI" at 5220,2640 h31.5